# Altium PCB GreenBox_pcb.PcbDoc
Units mm, origin at the board's own origin, x right, y up, seen from the top; angles counter-clockwise.
Board outline 152.4 x 101.6 mm, 2 copper layers (Top Layer, Bottom Layer); 71 components, 43 nets, 244 pads, 52 vias.
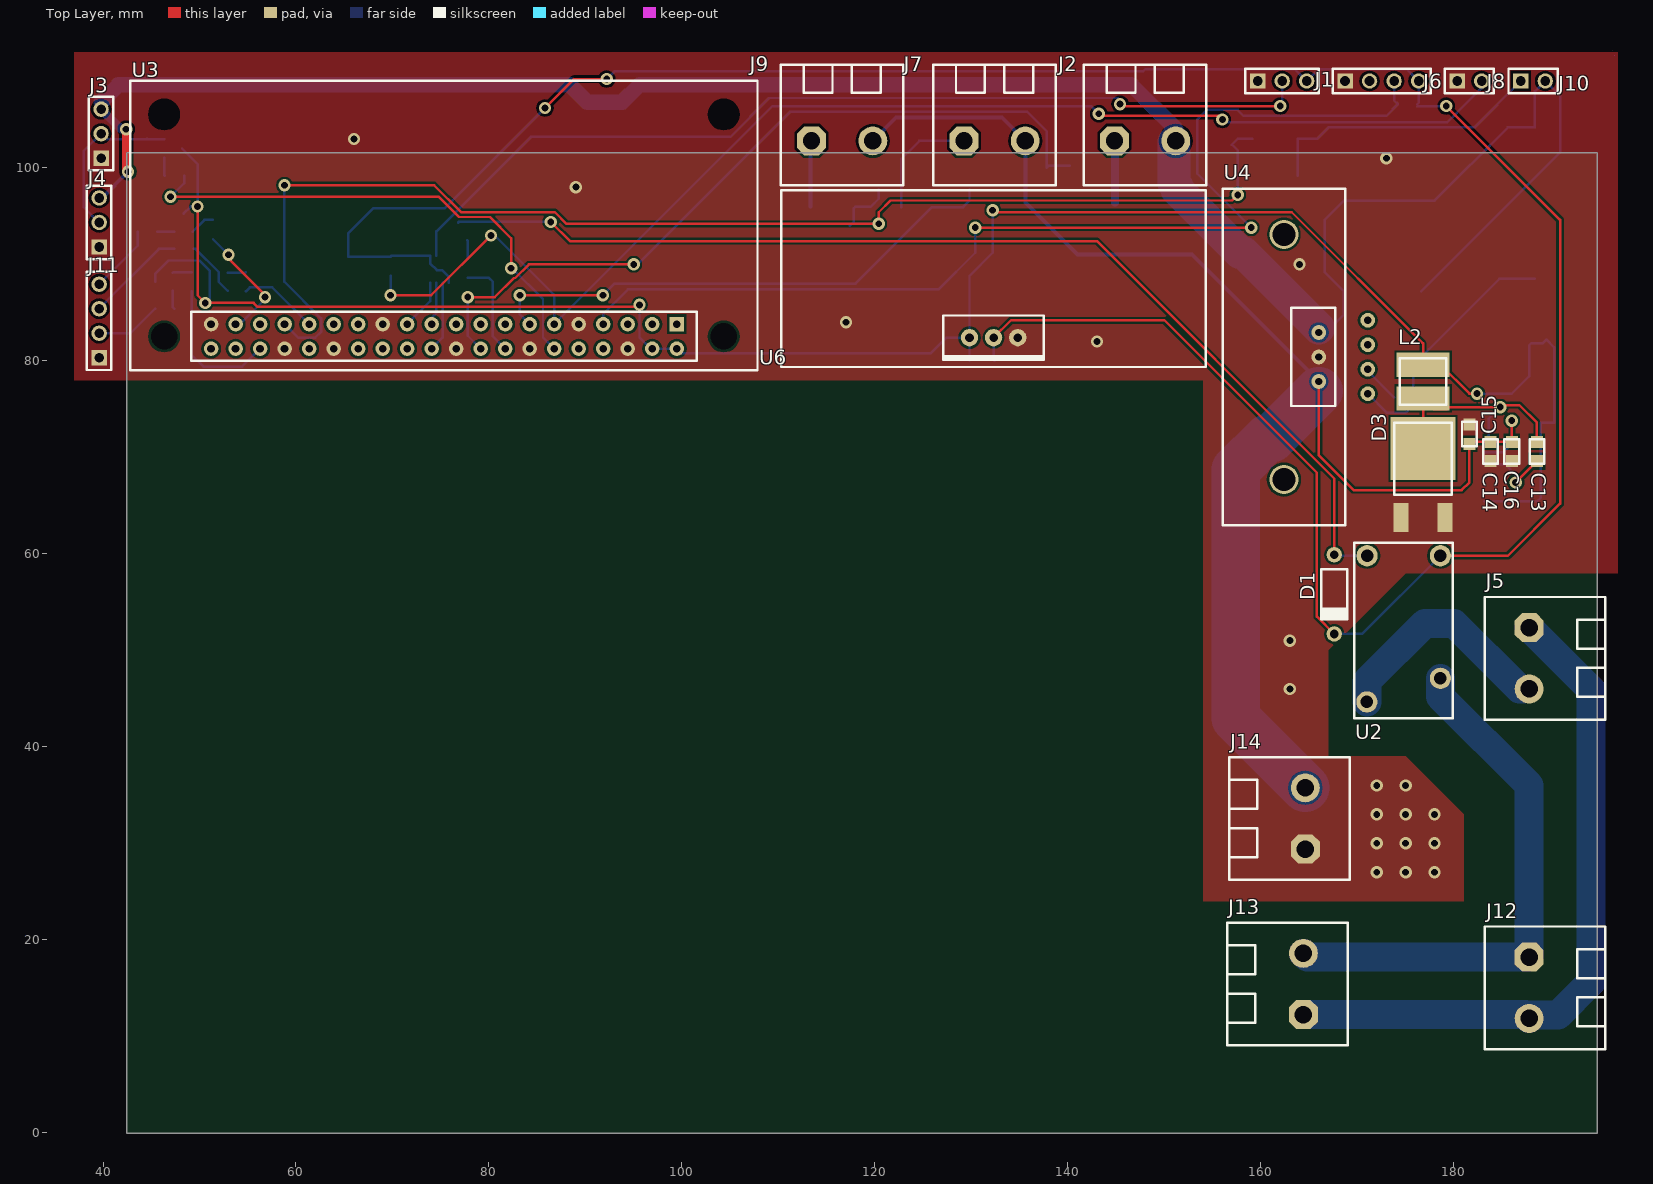
[diagram p0: Top Layer view]
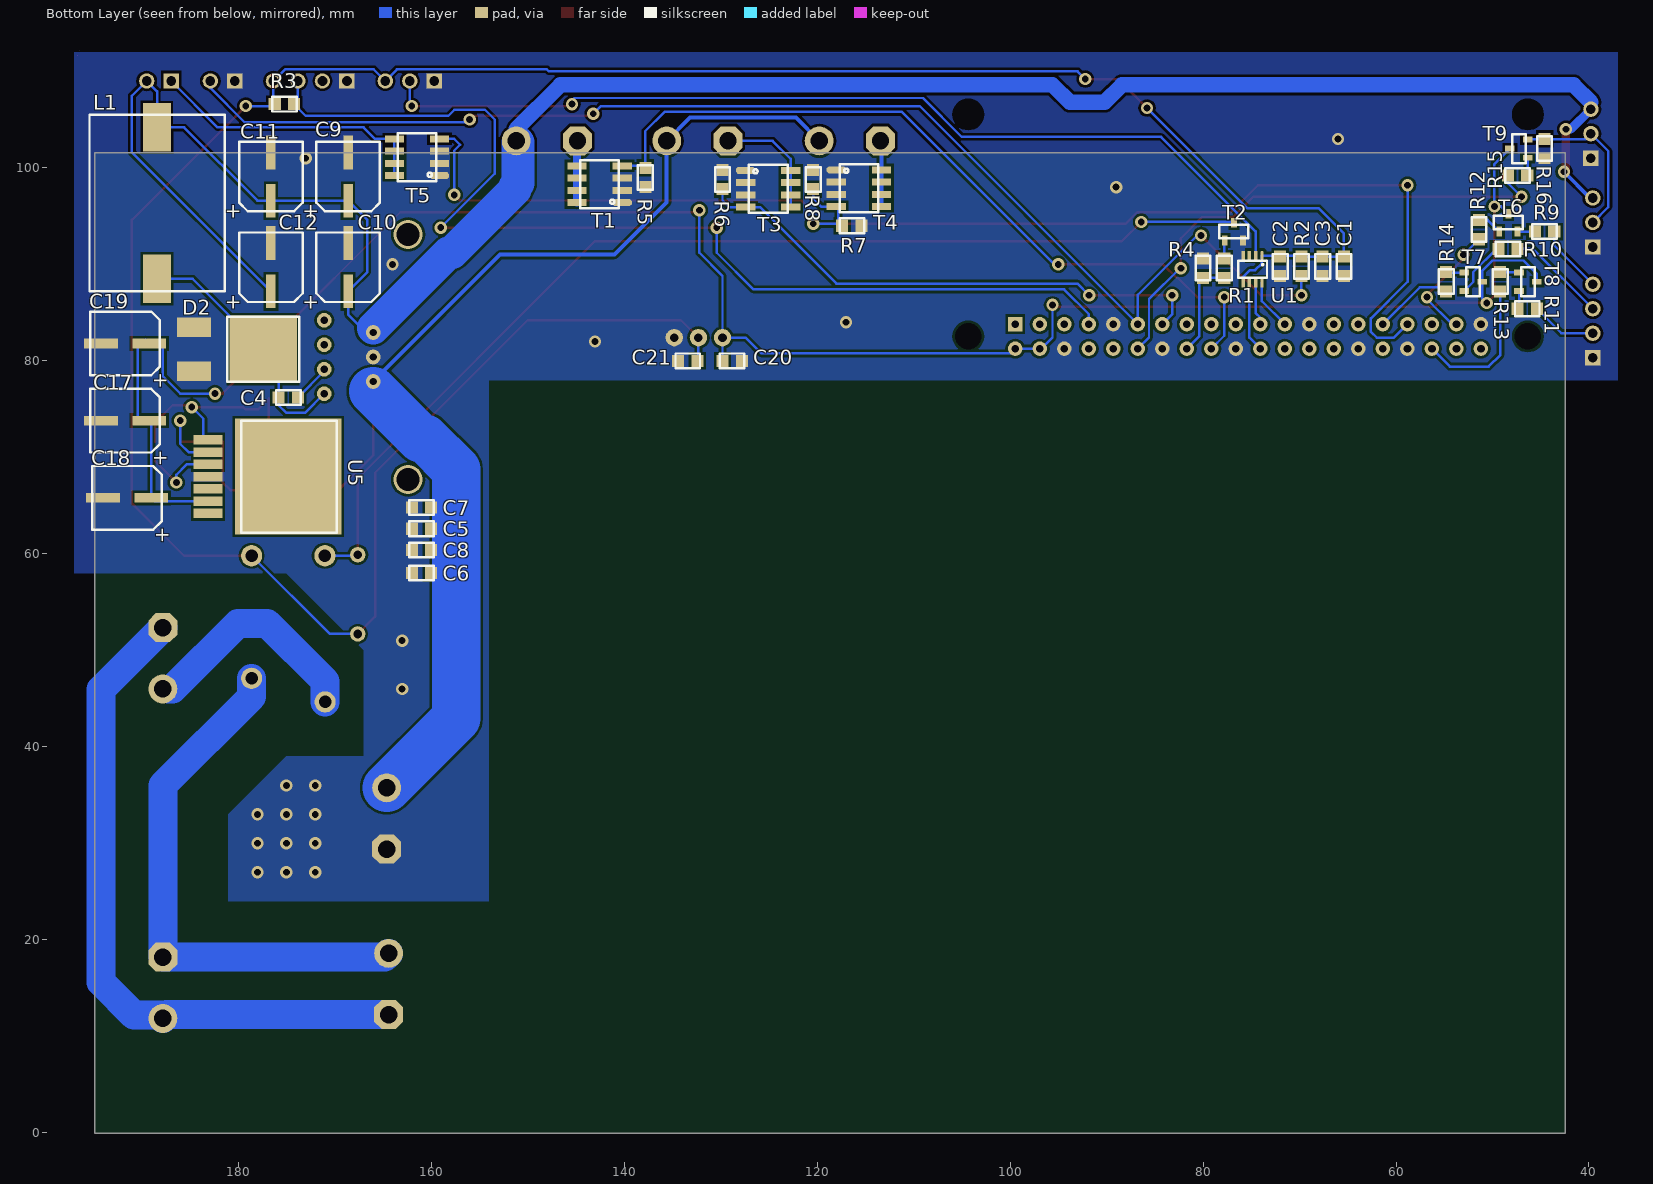
[diagram p1: Bottom Layer view, seen from below]

## Layer stack, top to bottom
Top Solder: solder mask 0.0102, Solder Resist, Dk 3.5
Top Layer: signal copper 0.0356
Dielectric 1: dielectric 0.32, FR-4, Dk 4.8
Bottom Layer: signal copper 0.0356
Bottom Solder: solder mask 0.0102, Solder Resist, Dk 3.5

## Board outline
42.477,-0.039 194.877,-0.039 194.877,101.561 42.477,101.561
cut-out: 196.4,112.2
cut-out: 196.6,111.6

## Design rules (kind name [scope] priority, off if disabled: settings)
Clearance Clearance_220 [All] p1: gap=0.254 ignorepadtopadclearanceinfootprint=FALSE except(0: SMDPad-Hole THPad-Hole Via-Hole Fill-Hole Poly-Hole Region-Hole Text-Hole)
PolygonConnect [All] p1: connectstyle=Direct reliefconductorwidth=0.254 reliefentries=4 polygonreliefangle="90 Angle" airgapwidth=0.254
RoutingVias [All] p1: holewidth=0.711 width=1.27 viastyle="Through Hole" minholewidth=0.711 minwidth=1.27 maxholewidth=0.711 maxwidth=1.27
SolderMaskExpansion [All] p1: expansion=0.102
Width Width_relay [InNet('NetJ5_2')] p1: maxlimit=3 minlimit=2.5 preferedwidth=3
Width Width_Neutre [InNet('Neutre')] p2: maxlimit=3 minlimit=2.5 preferedwidth=3
Width Width_220 [InNet('220V')] p3: maxlimit=3 minlimit=2.5 preferedwidth=3
30 further rules are at their usual default settings.

## Components (designator, comment, footprint, x,y, rotation, side; value= is the part's Value field where it differs from the comment)
C1 "1µF" 0805 65.4,89.8 r0 bottom
C2 "0.1µF" 0805 72,89.8 r0 bottom
C3 "1µF" 0805 67.6,89.8 r0 bottom
C4 "10nF" 0805 174.8,76.2 r270 bottom
C5 "10µF" 0805 161,62.6 r90 bottom
C6 "10µF" 0805 161,58 r90 bottom
C7 "10µF" 0805 161,64.8 r90 bottom
C8 "10µF" 0805 161,60.4 r90 bottom
C9 "100µF" Capa_polarisee 168.6,99.1 r0 bottom
C10 "100µF" Capa_polarisee 168.6,89.7 r0 bottom
C11 "100µF" Capa_polarisee 176.6,99.1 r0 bottom
C12 "100µF" Capa_polarisee 176.6,89.7 r0 bottom
C13 "10nF" 0805 188.6,70.6 r180 top
C14 "10µF" 0805 183.8,70.6 r180 top
C15 "10µF" 0805 181.6,72.4 r0 top
C16 "10µF" 0805 186,70.6 r180 top
C17 "100µF" Capa_polarisee 191.7,73.8 r270 bottom
C18 "100µF" Capa_polarisee 191.5,65.8 r270 bottom
C19 "100µF" Capa_polarisee 191.7,81.8 r270 bottom
C20 "100nF" 0805 128.8,80 r270 bottom
C21 "10µF" 0805 133.4,80 r90 bottom
D1 "1N5818" DO-41 167.6,55.8 r180 top
D2 "MBRD835LG" Zener12 177.4,81.2 r0 bottom
D3 "VS-30WQ03FNTR-M3" Zener5 176.8,70.6 r0 top
J1 "MoistureSoil" Petit_bornier_3_voies 162.2,109 r180 top
J2 "Pompe" "Gros Bornier 2 voies" 148,102.8 r0 top
J3 "San Ace 40" Petit_bornier_3_voies 39.8,103.54 r270 top
J4 "San Ace 40" Petit_bornier_3_voies 39.6,94.34 r270 top
J5 "Connecteur lampe" "Gros Bornier 2 voies" 187.8,49.175 r270 top
J6 "DHT22" Petit_bornier_4_voies 176.34,109 r180 top
J7 "Humidificateur" "Gros Bornier 2 voies" 132.4,102.8 r0 top
J8 "59145-010" Petit_bornier_2_voies 181.6,109 r180 top
J9 "Element_chauffant" "Gros Bornier 2 voies" 116.6,102.8 r0 top
J10 "Ventilateur" Petit_bornier_2_voies 188.2,109 r180 top
J11 "Led_connector" Petit_bornier_4_voies 39.6,87.94 r270 top
J12 "220v_connector" "Gros Bornier 2 voies" 187.8,15.025 r270 top
J13 "220v_connector" "Gros Bornier 2 voies" 164.4,15.425 r90 top
J14 "24v_connector" "Gros Bornier 2 voies" 164.6,32.575 r90 top
L1 "5DR1806-100ML" SDR1806-100ML 188.4,96.35 r90 bottom
L2 "74408943220" 74408943220 176.8,77.85 r0 top
R1 "2k" 0805 77.8,89.6 r180 bottom
R2 "10k" 0805 69.8,89.8 r180 bottom
R3 "4.7k" 0805 175.2,106.6 r90 bottom
R4 "10k" 0805 80,89.6 r0 bottom
R5 "10k" 0805 137.8,99 r180 bottom
R6 "10k" 0805 129.8,98.8 r0 bottom
R7 "10k" 0805 116.4,94 r90 bottom
R8 "10k" 0805 120.4,98.8 r0 bottom
R9 "150R" 0805 44.6,93.4 r90 bottom
R10 "150R" 0805 48.4,91.6 r90 bottom
R11 "150R" 0805 46.4,85.4 r90 bottom
R12 "2k" 0805 51.4,93.6 r180 bottom
R13 "2k" 0805 49.2,88.2 r180 bottom
R14 "2k" 0805 54.8,88.2 r180 bottom
R15 "2k" 0805 47.4,99.2 r90 bottom
R16 "10k" 0805 44.6,102 r180 bottom
T1 "IRL6342PbF" SO-8 142.54,98.295 r90 bottom
T2 "BC846A,215" "SOT-23 - duplicate" 76.8,93.4 r180 bottom
T3 "IRL6342PbF" SO-8 125.06,97.835 r270 bottom
T4 "IRL6342PbF" SO-8 115.66,97.895 r270 bottom
T5 "IRL6342PbF" SO-8 161.46,101.095 r90 bottom
T6 "BC846A,215" "SOT-23 - duplicate" 48.35,94.325 r180 bottom
T7 "BC846A,215" "SOT-23 - duplicate" 52,88.2 r270 bottom
T8 "BC846A,215" "SOT-23 - duplicate" 46.325,88.2 r270 bottom
T9 "BC846A,215" "SOT-23 - duplicate" 47.275,102 r90 bottom
U1 "MAX1118EKA+T" SOT-23 74.869,89.506 r0 bottom
U2 "OJE-SS-103HM,000" Relai 169.69,61.14 r270 top
U3 "Raspberry_PiZeroW" Raspberry 75.33,82.53 r180 top
U4 "LM2677-12" "TO-220-7 + dissipateur" 162.39,80.4 r90 top
U5 "LM2677-5" TO-263 169.76,62.2 r0 bottom
U6 "LD1117AV33" "TO-220 + Dissipateur" 132.3,79.86 r180 top

## Footprints (in the part's own frame and the unit in brackets; to place one, negate y for a bottom-side part, rotate by r counter-clockwise, add the part's x,y. Pads: shape width x height; smd on the part's side, far side on the other; paste and mask are expansions set on the pad)
0805 [mm]
  rect 1.25x1.25 smd: 1(0,-1) 2(0,1)
  silkscreen extent -0.76,-1.27 0.76,1.27
74408943220 [mm] "Bobine 22µH"
  rect 5.5x2.5 smd: 1(0,-1.75) 2(0,1.75)
  silkscreen extent -2.4,-2.4 2.4,2.4
Capa_polarisee [mm]
  rect 1x3.5 smd: 1(0,-2.5) 2(0,2.5)
  silkscreen extent -3.3,-3.6 3.3,3.6
DO-41 [mm] "Diode"
  round 1.6 hole 0.9: 1(0,-4.105) 2(0,4.105)
  silkscreen extent -1.36,-2.6 1.36,2.6
"Gros Bornier 2 voies" [mm]
  oct 3x3 hole 1.8: 1(-3.175,0)
  round 3 hole 1.8: 2(3.175,0)
  silkscreen extent -6.35,-4.6 6.35,7.9
Petit_bornier_2_voies [mm]
  round 1.6 hole 1: 1(-1.27,0)
  rect 1.6x1.6 hole 1: 2(1.27,0)
  silkscreen extent -2.54,-1.27 2.54,1.27
Petit_bornier_3_voies [mm]
  round 1.6 hole 1: 1(-2.54,0) 2(0,0)
  rect 1.6x1.6 hole 1: 3(2.54,0)
  silkscreen extent -3.81,-1.27 3.81,1.27
Petit_bornier_4_voies [mm]
  round 1.6 hole 1: 1(0,0) 2(2.54,0) 3(5.08,0)
  rect 1.6x1.6 hole 1: 4(7.62,0)
  silkscreen extent -1.27,-1.27 8.89,1.27
Raspberry [mm]
  rect 1.5x1.5 hole 0.8: 1(-24.13,-1.27)
  round 1.5 hole 0.8: 2(-24.13,1.27) 3(-21.59,-1.27) 4(-21.59,1.27) 5(-19.05,-1.27) 6(-19.05,1.27) 7(-16.51,-1.27) 8(-16.51,1.27) 9(-13.97,-1.27) 10(-13.97,1.27) 11(-11.43,-1.27) 12(-11.43,1.27) 13(-8.89,-1.27) 14(-8.89,1.27) 15(-6.35,-1.27) 16(-6.35,1.27) 17(-3.81,-1.27) 18(-3.81,1.27) 19(-1.27,-1.27) 20(-1.27,1.27) 21(1.27,-1.27) 22(1.27,1.27) 23(3.81,-1.27) 24(3.81,1.27) 25(6.35,-1.27) 26(6.35,1.27) 27(8.89,-1.27) 28(8.89,1.27) 29(11.43,-1.27) 30(11.43,1.27) 31(13.97,-1.27) 32(13.97,1.27) 33(16.51,-1.27) 34(16.51,1.27) 35(19.05,-1.27) 36(19.05,1.27) 37(21.59,-1.27) 38(21.59,1.27) 39(24.13,-1.27) 40(24.13,1.27)
  round 1.5 hole 2.75: 41(-29,-23) 41(-29,0) 41(29,-23) 41(29,0)
  silkscreen extent -32.5,-26.5 32.5,3.5
Relai [mm]
  round 2.2 hole 1.3: 1(1.34,8.91) 2(16.49,1.29) 3(14.04,8.91) 4(1.34,1.31)
  silkscreen extent 0,0 18.2,10.2
SDR1806-100ML [mm] "Bobine 12v"
  rect 5x2.9 smd: 1(-7.85,0) 2(7.85,0)
  silkscreen extent -9.15,-7 9.15,7
SO-8 [mm] "Mosfet"
  oct 0.72x2 smd: 1(-1.905,-2.34)
  rect 0.72x2 smd: 1(-0.635,-2.34) 1(0.635,-2.34) 4(1.905,-2.34) 5(-1.905,2.34) 5(-0.635,2.34) 5(0.635,2.34) 5(1.905,2.34)
  silkscreen extent -2.5,-2 2.5,2
SOT-23 [mm] "ADC"
  oct 0.35x1 smd: 1(-0.975,-1.4)
  rect 0.35x1 smd: 2(-0.325,-1.4) 3(0.325,-1.4) 4(0.975,-1.4) 5(0.975,1.4) 6(0.325,1.4) 7(-0.325,1.4) 8(-0.975,1.4)
  silkscreen extent -1.5,-0.87 1.5,0.87
"SOT-23 - duplicate" [mm]
  rect 0.6x1 smd: 1(-0.95,-0.925) 2(0.95,-0.925) 3(0,0.925)
  silkscreen extent -1.5,-0.7 1.5,0.7
"TO-220 + Dissipateur" [mm] "3.3v"
  round 1.8 hole 0.9: 1(2.5,-2.54) 2(-2.5,-2.54) 3(0,-2.54)
  silkscreen extent -22,-17.8 22,0.5
"TO-220-7 + dissipateur" [mil] "Alimentation 12v + dissipateur"
  round 60 hole 30: 1(-150,-342.13) 2(-100,-142.13) 3(-50,-342.13) 4(0,-142.13) 5(50,-342.13) 6(100,-142.13) 7(150,-342.13)
  round 118.11 hole 94.49: 8(-500,0) 8(500,0)
  silkscreen extent -687,-250 687,250
TO-263 [mm] "Regulateur-5.5v"
  rect 3x1 smd: 1(13.36,-9.61) 2(13.36,-8.34) 3(13.36,-7.07) 4(13.36,-5.8) 5(13.36,-4.53) 6(13.36,-3.26) 7(13.36,-1.99)
  rect 11x12 smd: 8(5.04,-5.8)
  silkscreen extent 0,-11.6 9.91,0
Zener5 [mm]
  rect 1.524x3 smd: 1(-2.28,-6.84) 1(2.28,-6.84)
  rect 6.74x6.5 smd: 2(0,0.305)
  silkscreen extent -3,-4.5 3,3
Zener12 [mm]
  rect 3.5x2 smd: 1(7.18,-2.285) 1(7.18,2.285)
  rect 7x7 smd: 2(0,0)
  silkscreen extent -3.74,-3.36 3.74,3.36

## Part data
C1 C2 C3 C4 C5 C6 C7 C8 C13 C14 C15 C16 C20 C21: library part Capa_0805
C9 C10 C11 C12 C17 C18 C19: library part Capa_polarisee
D1: library part diode
D2: library part Zener-12
D3: library part Zener-5
J1: library part Capteur_humidite_sol, "Connecteur Capteur d'humidité du sol"
J2: library part Pompe_connector
J3 J4: library part Ventilateur_aeration
J5: library part Lampe
J6: library part Capteur_humidite
J8: library part Capteur_reed
J9: library part "Element chauffant"
J10: library part "ventilateur chauffage"
J11: library part Led_connecteur
J12 J13: library part Connecteur_220v
J14: library part Connectique_24v
L1: library part Bobine-12
L2: library part Bobine-5
R1 R2 R3 R4 R5 R6 R7 R8 R9 R10 R11 R12 R13 R14 R15 R16: library part Resistance_0805
T1 T3 T4 T5: library part Mosfet
T2 T6 T7 T8 T9: library part transistor
U1: library part ADC
U2: library part Relai
U3: library part Raspberry
U4: library part Alimentation-12v
U5: library part Alimentation-5v
U6: library part Alimentation-3.3v

## Via types
v1: diameter 1.27, hole 0.711, Top Layer to Bottom Layer, 52 vias

## Nets (pads, with @x,y where several pads share a name; then routed paths per layer and width w, separated by ;. In a path a pad name is that pad's centre, name@x,y a point inside that pad or via, vN(x,y) a via of type N, cw(c..) or ccw(c..) an arc to the next point about the centre after c; other vN are vias at no path point)
220V: J12.1 J13.2 U2.3 | length 56.3
  Bottom Layer w3: J13.2 164.8,18.2 J12.1 187.8,36 178.6,45.2 U2.3
+3.3V: C1.1 C2.1 C3.1 C21.1 D1.2 J1.1 J6.1 R2.2 R3.2 U1.1 U1.5 U2.1 U6.3 | length 275.7
  Top Layer w0.254: v1(85.8,106.2) 88.8,109.2 v1(92.2,109.2) ; U6.3 134.1,84.2 150,84.2 165.8,68.4 165.8,53.495 D1.2 ; U2.1 185.6,59.8 191,65.2 191,94.6 v1(179.2,106.4) v1@179,106.4
  Bottom Layer w0.254: U1.5 75.844,88.67 75.114,89.4 74.6,89.4 73.894,90.106 U1.1 69.906,90.906 R2.2 C3.1 C1.1 65.4,93.2 68,95.8 75.4,95.8 v1(85.8,106.2) ; v1(92.2,109.2) 93,110 147.8,110 148,110.2 163.54,110.2 J1.1 165.94,110.2 175.14,110.2 J6.1 176.34,106.74 R3.2 ; U6.3 132.3,80.1 C21.1 ; D1.2 170.495,51.695 U2.1 ; R3.2@176.2,106.4 v1(179.2,106.4)
+5V: C17.2 C18.2 C19.2 C20.1 L2.2 T6.3 T7.3 T8.3 T9.3 U3.2 U3.4 U5.6 U6.1 | length 225.4
  Top Layer w0.254: v1(49.8,96) 49.8,86.8 v1(50.6,86) 55.6,86 56.016,85.584 57.221,85.584 57.237,85.6 77.363,85.6 77.379,85.584 95.384,85.584 v1(95.6,85.8) ; v1@132.2,95.4 163.2,95.4 176.8,81.8 L2.2 178.6,79.6 181.6,76.6 v1(182.4,76.6)
  Bottom Layer w0.254: T8.3 45.4,89 46.8,90.4 50,90.4 51.075,89.325 T7.3 51.075,86.475 v1(50.6,86) ; T9.3 49.8,100.4 v1(49.8,96) 49.1,96 T6.3 ; v1(95.6,85.8) 95.6,82.4 96.74,81.26 U3.4 U3.2 99.946,80.774 125.774,80.774 127.4,82.4 U6.1 ; C20.1 U6.1 ; v1(132.2,95.6) 132.2,91.2 129.8,88.8 U6.1 ; v1(182.4,76.6) 186,76.6 187.8,78.4 187.8,81.6 188,81.8 C19.2 189.6,82.2 190.4,81.4 190.4,73.6 189.2,73.6 189,73.6 C18.2 188.66,65.46 U5.6
+12V: C9.2 C10.2 C11.2 C12.2 J2.2 J3.1 J4.1 J10.1 L1.2 U4.6 | length 229.3
  Top Layer w0.254: v1@42.4,99.8 v1(42.6,99.6)
  Top Layer w0.9: v1@42.4,99.8 v1(42.4,104)
  Bottom Layer w0.254: J4.1 J4.1@39.88,96.88 ; J3.1 J3.1@39.8,106.8 ; v1@41.88,104 v1(42.4,104) ; J2.2@151,102.625 J2.2 ; U4.6@166,83.4 U4.6 166.74,82.94 168.6,84.8 C10.2 166.6,89.2 166.6,94.6 C9.2 C11.2 178,96.6 185.6,104.2 L1.2 188.4,107.93 J10.1 191,107.47 191,101.6 C12.2
  Bottom Layer w0.4: J4.1@39.88,96.88 v1(42.6,99.6)
  Bottom Layer w0.9: J3.1 v1@41.88,104
  Bottom Layer w1: J2.2 J2.2@151.175,104.025
  Bottom Layer w1.6: J3.1@39.8,106.8 41.6,108.6 88.4,108.6 90.2,106.8 93.8,106.8 95.6,108.6 146.6,108.6 J2.2@151.175,104.025
  Bottom Layer w3.4: J2.2@151,102.625 151,98.4 151.319,98.081 151.319,97.738 157.846,91.211 158.189,91.211 U4.6@166,83.4
+24v: C5.1 C6.1 C7.1 C8.1 C14.1 C15.1 C16.1 J7.2 J9.2 J14.2 U4.2 U5.2 | length 151.5
  Top Layer w0.254: U4.2 166,70.2 169.6,66.6 180.8,66.6 181.6,67.4 C15.1 ; C15.1@181.6,71.6 C14.1 C16.1 v1(186,73.8)
  Bottom Layer w0.254: U5.2 185.14,70.54 186,71.4 v1(186,73.8)
  Bottom Layer w0.41: J9.2 122.175,105.2 133.175,105.2 J7.2 135.6,102.775 135.6,96.4 141,91 152.86,91 U4.2
  Bottom Layer w5: J14.2 157.4,42.95 157.4,60.4 157.4,68.726 160.628,71.954 161.07,71.954 166,76.884
GND: C1.2 C2.2 C3.2 C5.2 C6.2 C7.2 C8.2 C9.1 C10.1 C11.1 C12.1 C14.2 C15.2 C16.2 C17.1 C18.1 C19.1 C20.2 C21.2 D2.1 D3.1 J1.3 J3.3 J4.3 J6.4 J8.2 J11.4 J14.1 R4.1 R5.1 R6.1 R7.1 R8.1 R16.1 T1.1 T2.2 T3.1 T4.1 T5.1 U1.4 U3.6 U3.9 U3.14 U3.20 U3.25 U3.30 U3.34 U3.39 U4.4 U5.4 U6.2
  other v1: 172,27 175,27 178,27 172,30 175,30 178,30 172,33 175,33 178,33 172,36 175,36 163,46 163,51 143,82 117,84 164,90 89,98 173,101 66,103
NetC4_1: C4.1 D2.2 L1.1 U4.1 | length 26.4
  Bottom Layer w0.254: U4.1 173.07,74.6 175,74.6 175.8,75.4 C4.1 175.8,79.6 D2.2 184.7,88.5 L1.1
NetC4_2: C4.2 U4.3 | length 4.1
  Bottom Layer w0.254: U4.3 171.08,78.92 C4.2
NetC13_1: C13.1 D3.2 L2.1 U5.1 | length 24.4
  Top Layer w0.254: D3.2 L2.1 177.9,75 179.275,75 179.475,75.2 v1(184.8,75.2) 185,75.4 186.8,75.4 188.6,73.6 C13.1
  Bottom Layer w0.254: U5.1 183.6,72.29 183.6,74 v1(184.8,75.2)
NetC13_2: C13.2 U5.3 | length 7.6
  Top Layer w0.254: v1(186.4,67.4) C13.2
  Bottom Layer w0.254: U5.3 185.33,69.27 186.4,68.2 v1(186.4,67.4)
NetD1_1: D1.1 T2.3 U2.4 | length 113.2
  Top Layer w0.254: v1(86.4,94.4) 88.4,92.4 143,92.4 167.6,67.8 D1.1
  Bottom Layer w0.254: T2.3 76.875,94.4 v1(86.4,94.4) ; D1.1 167.705,59.8 U2.4
NetJ1_2: J1.2 U1.2 | length 99.4
  Top Layer w0.254: v1(145.4,106.6) 145.6,106.6 145.8,106.4 v1(162,106.4)
  Bottom Layer w0.254: U1.2 74.544,93.408 84.336,103.2 105,103.2 109.038,107.238 145.162,107.238 145.4,107 v1(145.4,106.6) ; v1(162,106.4) 162.2,106.2 J1.2
NetJ2_1: J2.1 T1.5 | length 6.4
  Bottom Layer w0.254: J2.1 J2.1@144.88,102.745
  Bottom Layer w0.8: T1.5@144.88,96.39 144.88,97.66 144.88,98.93 144.88,100.2 J2.1@144.88,102.745
NetJ3_2: J3.2 J4.2 R16.2 T9.2 | length 17.4
  Bottom Layer w0.254: J4.2 38,95.94 38,101.74 J3.2 40.356,102.984 44.584,102.984 R16.2 44.65,102.95 T9.2
NetJ5_2: J5.2 U2.2 | length 24.3
  Bottom Layer w0.254: J5.2@187.2,46 J5.2
  Bottom Layer w3: U2.2 170.98,46.78 177,52.8 180,52.8 186.8,46 J5.2@187.2,46
NetJ6_2: J6.2 R3.1 U3.7 | length 111.3
  Top Layer w0.254: v1(130.4,93.8) v1(159,93.8)
  Bottom Layer w0.254: U3.7 91.84,84.84 94.4,87.4 126.6,87.4 130.4,91.2 v1@130.4,93.6 ; v1(159,93.8) 153.4,99.4 153.4,105 154.416,106.016 157.584,106.016 158.216,105.384 172.984,105.384 R3.1 173.8,107 J6.2
NetJ7_1: J7.1 T3.5 | length 12.3
  Bottom Layer w0.254: T3.5@122.72,95.93 122.72,97.2 122.72,98.47 122.72,99.74 122.72,100.92 124.6,102.8 J7.1
NetJ8_1: J8.1 R2.1 U3.11 | length 135.5
  Top Layer w0.254: v1(69.8,86.8) 74,86.8 v1(80.2,93) ; v1(143.2,105.6) 143.4,105.4 155.6,105.4 v1(156,105)
  Bottom Layer w0.254: v1(69.8,86.8) R2.1 ; v1(80.2,93) 80.6,93 86.76,86.84 U3.11 109.36,106.4 142.4,106.4 v1(143.2,105.6) ; v1(156,105) 156.292,104.708 179.308,104.708 182.87,108.27 J8.1
NetJ9_1: J9.1 T4.5 | length 6.9
  Bottom Layer w0.254: J9.1@113.32,102.695 J9.1
  Bottom Layer w0.41: T4.5@113.32,95.99 113.32,97.26 113.32,98.53 113.32,99.8 J9.1@113.32,102.695
NetJ10_2: J10.2 T5.5 | length 29.4
  Bottom Layer w0.254: T5.5@163.8,99.19 163.8,100.46 163.8,101.73 163.8,103 165.8,103 167,104.2 182.13,104.2 J10.2
NetJ11_1: J11.1 R9.1 | length 7.1
  Bottom Layer w0.254: J11.1 43.6,91.94 R9.1
NetJ11_2: J11.2 R10.1 | length 10.4
  Bottom Layer w0.254: J11.2 45.8,91.6 R10.1
NetJ11_3: J11.3 R11.1 | length 6.9
  Bottom Layer w0.254: J11.3 42.86,82.86 R11.1
NetR1_1: R1.1 R4.2 U3.16 | length 10.2
  Bottom Layer w0.254: R1.1 R4.2 80.4,88.2 80.4,82.54 U3.16
NetR1_2: R1.2 T2.1 | length 1.9
  Bottom Layer w0.254: T2.1 77.8,92.425 R1.2
NetR5_2: R5.2 T1.4 U3.18 | length 81
  Top Layer w0.254: v1(77.8,86.6) 80.6,86.6 82.584,88.584 82.721,88.584 84.137,90 v1(95,90)
  Bottom Layer w0.254: v1(77.8,86.6) 77.8,82.6 U3.18 ; v1(95,90) 95.4,90 111.2,105.8 135.8,105.8 137.8,103.8 R5.2 138,100.2 T1.4
NetR6_2: R6.2 T3.4 U3.13 | length 55.3
  Top Layer w0.254: v1(83.2,86.8) v1(91.8,86.8)
  Bottom Layer w0.254: v1(83.2,86.8) 83.2,84.82 U3.13 ; v1(91.8,86.8) 93,88 118,88 125.93,95.93 T3.4 129.13,95.93 129.8,96.6 R6.2
NetR7_2: R7.2 R8.2 T4.4 T5.4 U3.33 | length 140.8
  Top Layer w0.254: v1(58.8,98.2) 74.318,98.2 77.102,95.416 86.821,95.416 88.037,94.2 v1(120.4,94.2) 120.4,95.4 121.616,96.616 156.984,96.616 157.568,97.2 v1(157.6,97.2)
  Bottom Layer w0.254: v1(58.8,98.2) 58.8,88.2 62.6,84.4 62.6,83 62,82.4 60.22,82.4 U3.33 ; R7.2 R7.2@117.6,94.2 ; v1(120.4,94.2) R7.2@117.6,94.2 ; R8.2 120.4,96.8 119.59,95.99 T4.4 117.8,95.79 117.8,94.4 R7.2@117.6,94.2 ; v1@157.6,96.8 v1(157.6,97.2) 157.6,101.8 157,102.4 157.6,103 T5.4
NetR9_2: R9.2 T6.2 | length 1.8
  Bottom Layer w0.254: R9.2 T6.2
NetR10_2: R10.2 T7.2 | length 5.9
  Bottom Layer w0.254: R10.2 49.6,91.6 52,89.2 52,88.175 T7.2
NetR11_2: R11.2 T8.2 | length 1.9
  Bottom Layer w0.254: T8.2 47.25,85.55 R11.2
NetR12_1: R12.1 U3.37 | length 12.9
  Top Layer w0.254: v1(53,91) 53,90.6 57,86.6 v1(56.8,86.6)
  Bottom Layer w0.254: R12.1 v1(53,91) ; U3.37 54.212,83.8 56.8,86.388 v1(56.8,86.6)
NetR12_2: R12.2 T6.1 | length 2.6
  Bottom Layer w0.254: T6.1 50.5,94.6 R12.2
NetR13_1: R13.1 U3.36 | length 15
  Bottom Layer w0.254: R13.1 49.184,87.184 49.184,80.616 50.4,79.4 54.42,79.4 U3.36
NetR13_2: R13.2 T8.1 | length 2
  Bottom Layer w0.254: T8.1 47.3,89.2 R13.2
NetR14_1: R14.1 U3.31 | length 8.3
  Bottom Layer w0.254: R14.1 55.216,87.616 57.544,87.616 U3.31
NetR14_2: R14.2 T7.1 | length 1.9
  Bottom Layer w0.254: T7.1 54.75,89.15 R14.2
NetR15_1: R15.1 T9.1 | length 1.9
  Bottom Layer w0.254: T9.1 46.35,99.25 R15.1
NetR15_2: R15.2 U3.12 | length 53.2
  Top Layer w0.254: v1(47,97) 47.016,97.016 74.784,97.016 76.892,94.908 80.092,94.908 82.3,92.7 v1(82.3,89.6)
  Bottom Layer w0.254: v1(47,97) 48.4,98.4 R15.2 ; v1(82.3,89.6) 82.4,89.6 85.6,86.4 85.6,82.42 U3.12
NetU1_6: U1.6 U3.22 | length 7.3
  Bottom Layer w0.254: U3.22 75.2,82.4 75.2,87.2 75.194,87.206 U1.6
NetU1_7: U1.7 U3.21 | length 4.5
  Bottom Layer w0.254: U3.21 74.06,84.46 74.544,84.944 U1.7
NetU1_8: U1.8 U3.23 | length 5.3
  Bottom Layer w0.254: U3.23 73.894,86.174 U1.8
Neutre: J5.1 J12.2 J13.1 | length 70.9
  Bottom Layer w3: J13.1 187.4,12.25 J12.2 188.15,12.2 190.8,12.2 194.2,15.6 194.2,45.95 J5.1
pads on no net: J6.3 U1.3 U3.1 U3.3 U3.5 U3.8 U3.10 U3.15 U3.17 U3.19 U3.24 U3.26 U3.27 U3.28 U3.29 U3.32 U3.35 U3.38 U3.40 U3.41 U4.5 U4.7 U4.8 U5.5 U5.7 U5.8

## Polygon pours and split planes (outlines as drawn)
GND on Top Layer "Top Layer-GND" (solid, remove dead copper, pour order 8): 37,112 37,78 154,78 154,7 197,7 197,112
GND on Bottom Layer "Bottom Layer-GND" (solid, remove dead copper, pour order 6): 37,112 197,112 197,7 154,7 154,78 37,78

## Other copper
Top Layer:
  pour cut-out: 154,7 154,24 181,24 181,33 175,39 167,39 167,50 175,58 197,58 197,7
Bottom Layer:
  pour cut-out: 154,24 181,24 181,33 175,39 167,39 167,50 175,58 197,58 197,7 154,7

## Silkscreen, mask and mechanical layers (free items; w line width, h text height)
Mechanical 1:
  lines w0.254: 37,78 154,78 154,7 197,7 197,112 37,112 37,78

## Text inside footprints (layer, text, board x,y; h text height)
C9: Bottom Overlay "+" at 171.6,96.1 h1.52 r180
C10: Bottom Overlay "+" at 171.6,86.7 h1.52 r180
C11: Bottom Overlay "+" at 179.6,96.1 h1.52 r180
C12: Bottom Overlay "+" at 179.6,86.7 h1.52 r180
C17: Bottom Overlay "+" at 188.7,70.8 h1.52 r90
C18: Bottom Overlay "+" at 188.5,62.8 h1.52 r90
C19: Bottom Overlay "+" at 188.7,78.8 h1.52 r90